# Altium PCB PCB_CL-SP-01.PcbDoc
Units mm, origin at the board's own origin, x right, y up, seen from the top; angles counter-clockwise.
Board outline 51.05 x 93.6 mm, 2 copper layers (Top Layer, Bottom Layer); 55 components, 21 nets, 131 pads, 96 vias.
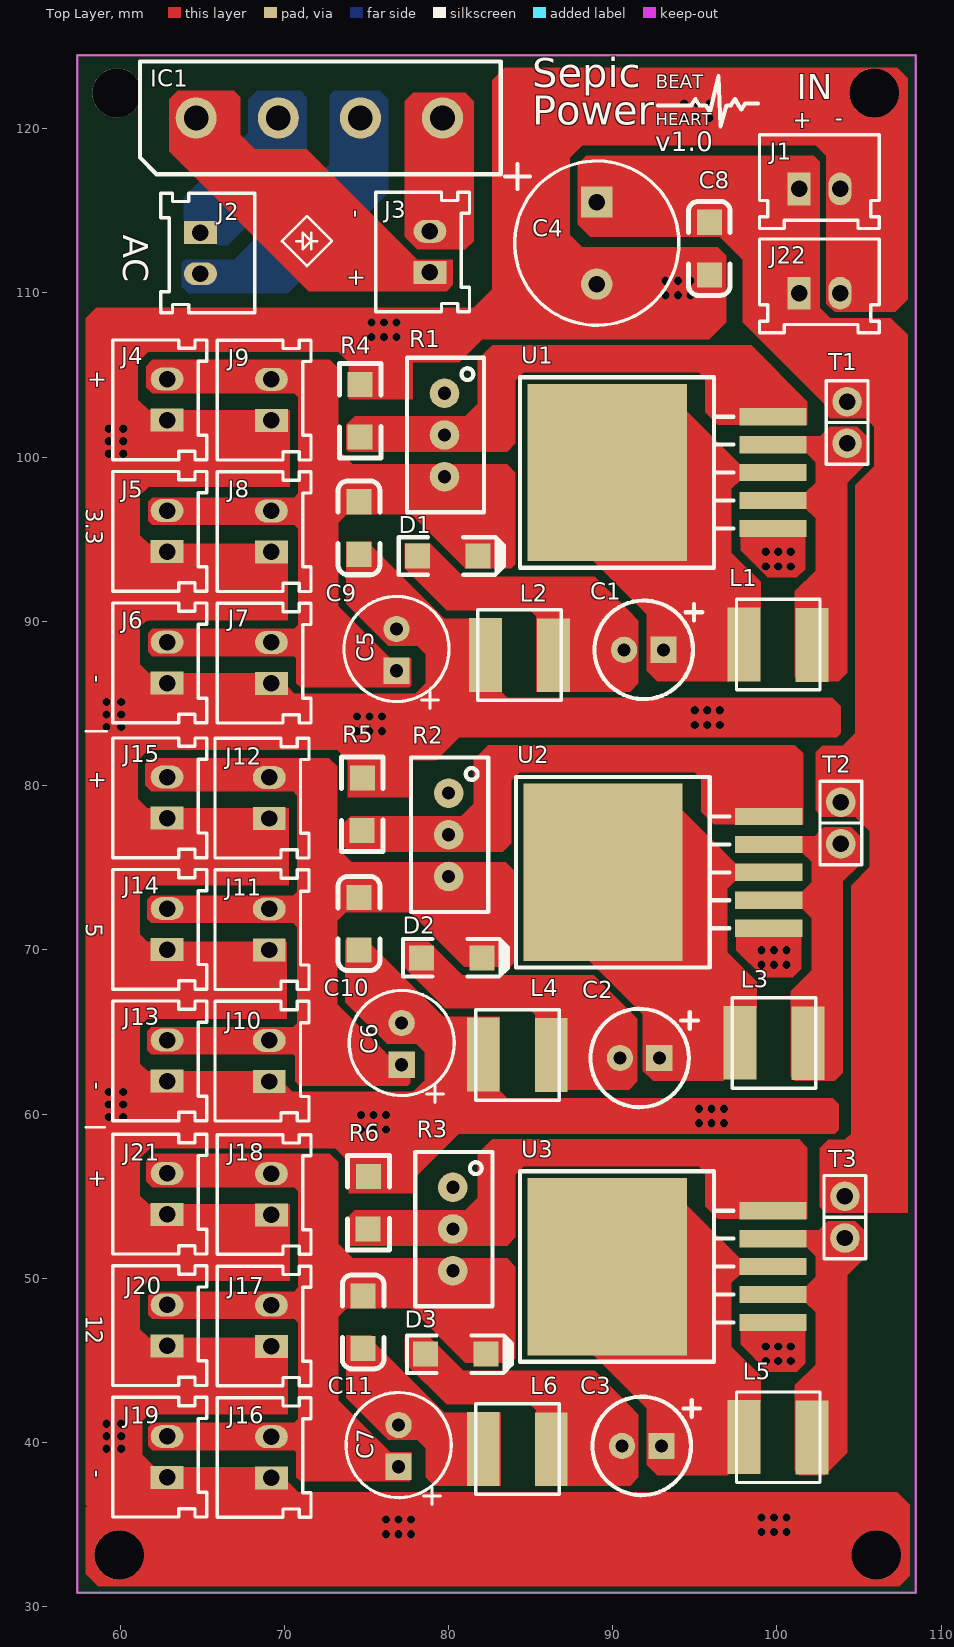
[diagram p0: Top Layer view]
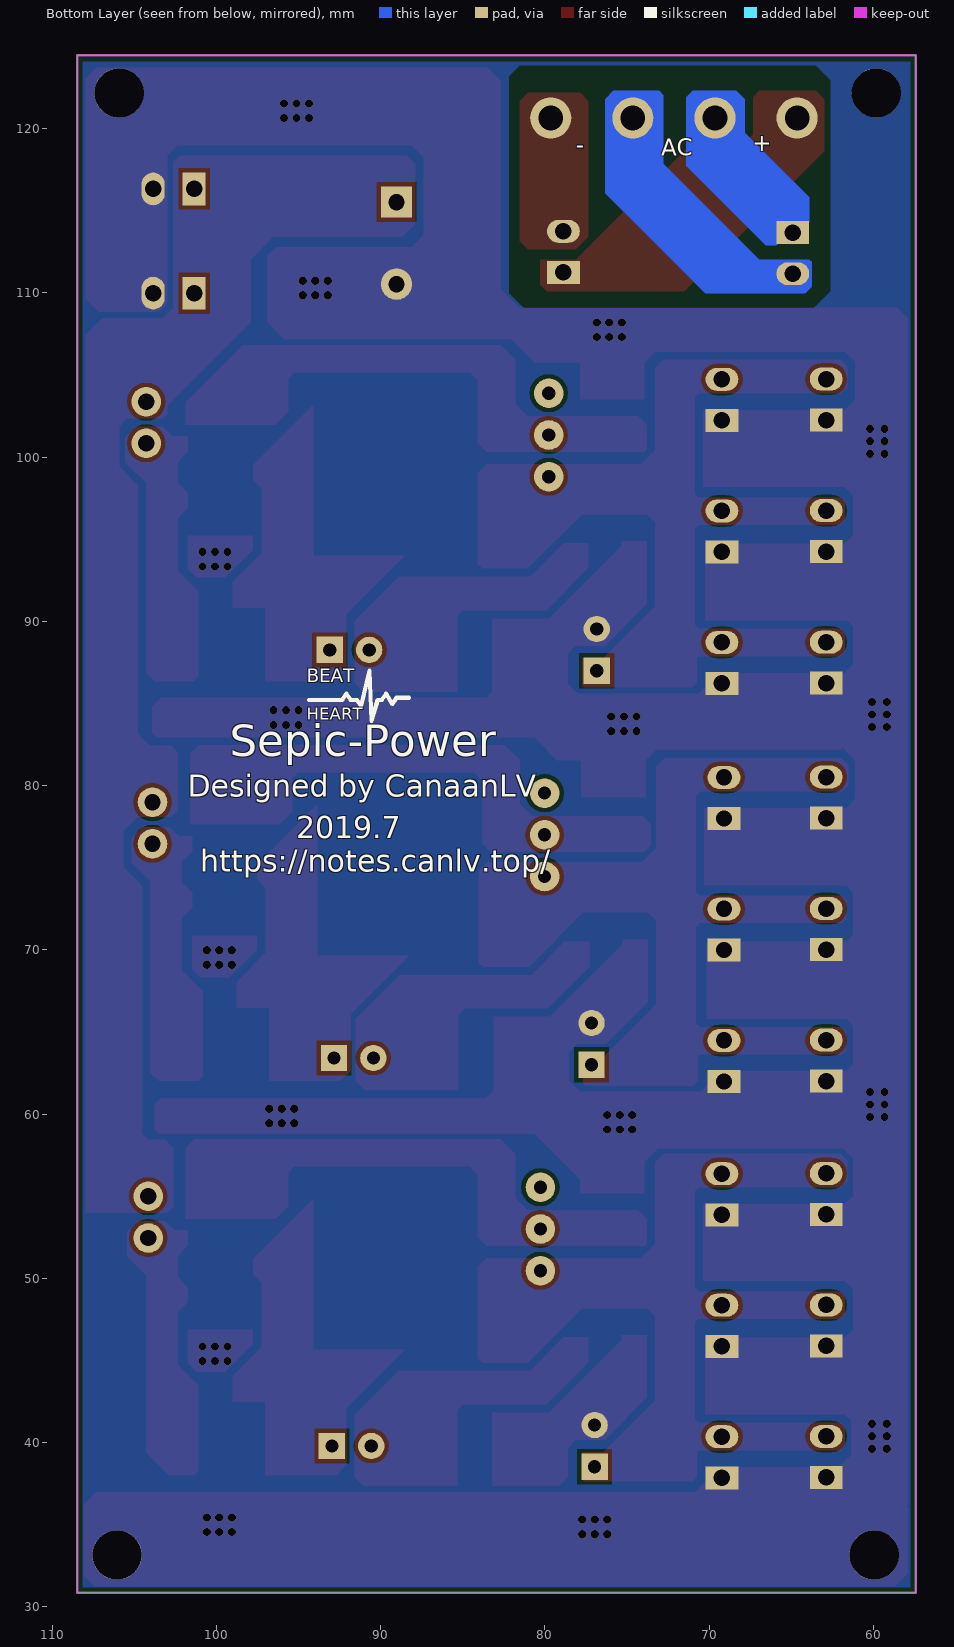
[diagram p1: Bottom Layer view, seen from below]

## Layer stack, top to bottom
Top Solder: solder mask 0.0102, Solder Resist, Dk 3.5
Top Layer: signal copper 0.0356
Dielectric 1: dielectric 0.32, FR-4, Dk 4.8
Bottom Layer: signal copper 0.0356
Bottom Solder: solder mask 0.0102, Solder Resist, Dk 3.5

## Board outline
57.404,30.861 108.458,30.861 108.458,124.46 57.404,124.46

## Design rules (kind name [scope] priority, off if disabled: settings)
Clearance [All] p1: gap=0.254
PolygonConnect [All] p1: connectstyle=Direct reliefconductorwidth=0.254 reliefentries=4 polygonreliefangle="90 Angle" airgapwidth=0.254
RoomDefinition Sheet_CL-SP-01 [InComponentClass('Sheet1')] p1: confinementstyle=ConfineIn formatcopy=TRUE lockcomponents=FALSE outline 57.404,30.861 108.458,30.861 108.458,124.714 57.404,124.714
RoutingVias [All] p1: holewidth=0.711 width=1.27 viastyle="Through Hole" minholewidth=0.711 minwidth=1.27 maxholewidth=0.711 maxwidth=1.27
SolderMaskExpansion [All] p1: expansion=0.102
Width [All] p1: maxlimit=0.254 minlimit=0.254 preferedwidth=0.254
30 further rules are at their usual default settings.

## Components (designator, comment, footprint, x,y, rotation, side; value= is the part's Value field where it differs from the comment)
C1 "uF" CZ0.60/50V47U 93.091,88.265 r0 top
C2 "uF" CZ0.60/50V47U 92.837,63.413 r0 top
C3 "uF" CZ0.60/50V47U 92.964,39.791 r0 top
C4 "470uF" CZ1.00/35V470uF 89.027,113.03 r180 top
C5 "uF" CZ0.65/25V100U 76.835,88.265 r90 top
C6 "uF" CZ0.65/25V100U 77.149,64.273 r90 top
C7 "uF" CZ0.65/25V100U 76.962,39.791 r90 top
C8 "uF" C1206 95.885,114.3 r270 top
C9 "uF" C1206 74.549,97.282 r270 top
C10 "uF" C1206 74.549,73.192 r270 top
C11 "uF" C1206 74.803,48.935 r270 top
D1 "0805D" 0805D 79.883,93.98 r0 top
D2 "0805D" 0805D 80.137,69.509 r0 top
D3 "0805D" 0805D 80.391,45.379 r0 top
IC1 "整流桥1" 整流桥3 72.136,120.65 r0 top
J1 "SIP-2" 2.54XH接插件2P 101.346,116.332 r0 top
J2 "SIP-2" 2.54XH接插件2P 64.897,113.665 r270 top
J3 "SIP-2" 2.54XH接插件2P 78.867,111.252 r90 top
J4 "SIP-2" 2.54XH接插件2P 62.865,102.249 r90 top
J5 "SIP-2" 2.54XH接插件2P 62.865,94.241 r90 top
J6 "SIP-2" 2.54XH接插件2P 62.865,86.233 r90 top
J7 "SIP-2" 2.54XH接插件2P 69.215,86.219 r90 top
J8 "SIP-2" 2.54XH接插件2P 69.215,94.227 r90 top
J9 "SIP-2" 2.54XH接插件2P 69.215,102.235 r90 top
J10 "SIP-2" 2.54XH接插件2P 69.088,61.981 r90 top
J11 "SIP-2" 2.54XH接插件2P 69.088,69.989 r90 top
J12 "SIP-2" 2.54XH接插件2P 69.088,77.997 r90 top
J13 "SIP-2" 2.54XH接插件2P 62.865,62.002 r90 top
J14 "SIP-2" 2.54XH接插件2P 62.865,70.01 r90 top
J15 "SIP-2" 2.54XH接插件2P 62.865,78.018 r90 top
J16 "SIP-2" 2.54XH接插件2P 69.215,37.851 r90 top
J17 "SIP-2" 2.54XH接插件2P 69.215,45.859 r90 top
J18 "SIP-2" 2.54XH接插件2P 69.215,53.867 r90 top
J19 "SIP-2" 2.54XH接插件2P 62.865,37.872 r90 top
J20 "SIP-2" 2.54XH接插件2P 62.865,45.88 r90 top
J21 "SIP-2" 2.54XH接插件2P 62.865,53.888 r90 top
J22 "SIP-2" 2.54XH接插件2P 101.346,109.982 r0 top
L1 "贴片电感" L5X5 102.616,86.106 r180 top
L2 "贴片电感" L5X5 86.868,85.471 r180 top
L3 "贴片电感" L5X5 102.362,61.849 r180 top
L4 "贴片电感" L5X5 86.741,61.127 r180 top
L5 "贴片电感" L5X5 102.616,37.846 r180 top
L6 "贴片电感" L5X5 86.741,37.124 r180 top
R1 "主控" ADJ-3296-1 79.756,101.346 r90 top
R2 "主控" ADJ-3296-1 80.01,77.002 r90 top
R3 "主控" ADJ-3296-1 80.264,52.999 r90 top
R4 "R贴片电阻" R1206 74.549,102.616 r270 top
R5 "R贴片电阻" R1206 74.676,78.653 r270 top
R6 "R贴片电阻" R1206 75.057,54.396 r270 top
T1 "SIP-2" 2.54排针1X2 104.267,103.378 r270 top
T2 "SIP-2" 2.54排针1X2 103.886,78.994 r270 top
T3 "SIP-2" 2.54排针1X2 104.14,54.991 r270 top
U1 "XL6009" TO-263-5 89.662,99.06 r90 top
U2 "XL6009" TO-263-5 89.408,74.716 r90 top
U3 "XL6009" TO-263-5 89.662,50.713 r90 top

## Footprints (in the part's own frame and the unit in brackets; to place one, negate y for a bottom-side part, rotate by r counter-clockwise, add the part's x,y. Pads: shape width x height; smd on the part's side, far side on the other; paste and mask are expansions set on the pad)
2.54XH接插件2P [mm]
  rect 1.4x2 hole 1: 1(0,0)
  oval 1.4x2 hole 1: 2(2.5,0)
  silkscreen extent -2.41,-2.41 4.88,3.3, body extent -2.51,-2.3 4.99,3.4, height 7
2.54排针1X2 [mm]
  round 1.8 hole 1: 1(0,0) 2(2.54,0)
  silkscreen extent -1.27,-1.27 3.81,1.27, body extent -1.27,-1.27 3.81,1.27, height 8.54
0805D [mil]
  rect 60x60 smd: A(-70,0) K(75,0)
  silkscreen extent -114,-45 137,45, body extent -60,-29 70,30, height 39
ADJ-3296-1 [mm]
  round 1.8 hole 0.8: 1(-2.54,0) 2(0,0) 3(2.54,0)
  silkscreen extent -4.7,-2.41 4.7,2.29, body extent -4.76,-2.42 4.76,2.41, height 11.55
C1206 [mil] "3216/A型"
  rect 60x60 smd: 1(0,0) 2(126,0)
  silkscreen extent -50,-50 175,50, body extent 0,-31 126,32, height 39
CZ0.60/50V47U [mm]
  rect 1.6x1.6 hole 0.8: 1(0,0)
  round 1.6 hole 0.8: 2(-2.4,0)
  silkscreen extent -4.2,-3 2.36,3, body extent -4.45,-3.17 1.91,3.18, height 13.03
CZ0.65/25V100U [mm]
  rect 1.6x1.6 hole 0.8: 1(-1.27,0)
  round 1.6 hole 0.8: 2(1.27,0)
  silkscreen extent -3.56,-3.2 3.25,3.2, body extent -3.3,-3.05 3.05,3.3, height 13.03
CZ1.00/35V470uF [mm]
  rect 1.905x1.905 hole 1: 1(0,-2.5)
  round 1.905 hole 1: 2(0,2.5)
  silkscreen extent -5,-5 5.59,5, body extent -4.95,-5 5.03,5, height 16.8
L5X5 [mm]
  rect 2x4.5 smd: 1(0.483,-2.464) 2(4.623,-2.489)
  silkscreen extent 0,-5.23 5.08,0.28, body extent 0.06,-4.91 4.96,-0.01, height 2.91
R1206 [mil] "1/4W"
  rect 60x60 smd: 1(-71,3) 2(55,2)
  silkscreen extent -121,-47 105,53, body extent -71,-29 55,33, height 24
TO-263-5 [mm] "TO-263, 5PIN"
  rect 1.05x4.1 smd: 1(-3.4,-10.1) 2(-1.7,-10.1) 3(0,-10.1) 4(1.7,-10.1) 5(3.4,-10.1)
  rect 10.8x9.7 smd: 6(0,0)
  silkscreen extent -5.8,-7.7 5.8,5.3, body extent -5.1,-10.1 5.06,3.91, height 4.56
整流桥3 [mm]
  round 2.5 hole 1.5: 1(-7.5,0) 2(-2.5,0) 3(2.5,0) 4(7.5,0)
  silkscreen extent -10.92,-3.43 11.05,3.43

## Part data
C1 C2 C3 C4 C5 C6 C7: library part C直插电容
C8 C9 C10 C11: library part C贴片电容
R1 R2 R3: library part R电位器
U1 U2 U3: "Switching Power"

## Free pads (board coordinates)
  round 3 hole 3: 0(59.817,122.174) 1(105.918,122.174) 2(106.045,33.147) 3(59.944,33.147)

## Via types
v1: diameter 0.5, hole 0.5, Top Layer to Bottom Layer, tented both sides, 96 vias

## Nets (pads, with @x,y where several pads share a name; then routed paths per layer and width w, separated by ;. In a path a pad name is that pad's centre, name@x,y a point inside that pad or via, vN(x,y) a via of type N, cw(c..) or ccw(c..) an arc to the next point about the centre after c; other vN are vias at no path point)
3.3V: C5.1 C9.1 D1.K J4.2 J5.2 J6.2 J7.2 J8.2 J9.2 R1.1
5V: C6.1 C10.1 D2.K J10.2 J11.2 J12.2 J13.2 J14.2 J15.2 R2.1
12V: C7.1 C11.1 D3.K J16.2 J17.2 J18.2 J19.2 J20.2 J21.2 R3.1
GND: C4.2 C5.2 C6.2 C7.2 C8.2 C9.2 C10.2 C11.2 J1.2 J4.1 J5.1 J6.1 J7.1 J8.1 J9.1 J10.1 J11.1 J12.1 J13.1 J14.1 J15.1 J16.1 J17.1 J18.1 J19.1 J20.1 J21.1 J22.2 L2.2 L4.2 L6.2 pad.0 pad.1 pad.2 pad.3 R4.1 R5.1 R6.1 U1.1 U2.1 U3.1
  other v1: 76.2,34.417 76.962,34.417 77.724,34.417 99.06,34.544 99.822,34.544 100.584,34.544 76.2,35.306 76.962,35.306 77.724,35.306 99.06,35.433 99.822,35.433 100.584,35.433 59.182,39.624 60.071,39.624 59.182,40.386 60.071,40.386 59.182,41.148 60.071,41.148 99.314,44.958 100.076,44.958 100.838,44.958 99.314,45.847 100.076,45.847 100.838,45.847 74.676,59.055 75.438,59.055 76.2,59.055 95.25,59.436 96.012,59.436 96.774,59.436 59.309,59.817 60.198,59.817 74.676,59.944 75.438,59.944 76.2,59.944 95.25,60.325 96.012,60.325 96.774,60.325 59.309,60.579 60.198,60.579 59.309,61.341 60.198,61.341 99.06,69.088 99.822,69.088 100.584,69.088 99.06,69.977 99.822,69.977 100.584,69.977 74.422,83.312 75.184,83.312 75.946,83.312 59.182,83.566 60.071,83.566 94.996,83.693 95.758,83.693 96.52,83.693 74.422,84.201 75.184,84.201 75.946,84.201 59.182,84.328 60.071,84.328 94.996,84.582 95.758,84.582 96.52,84.582 59.182,85.09 60.071,85.09 99.314,93.345 100.076,93.345 100.838,93.345 99.314,94.234 100.076,94.234 100.838,94.234 59.309,100.203 60.198,100.203 59.309,100.965 60.198,100.965 59.309,101.727 60.198,101.727 75.311,107.315 76.073,107.315 76.835,107.315 75.311,108.204 76.073,108.204 76.835,108.204 93.218,109.855 93.98,109.855 94.742,109.855 93.218,110.744 93.98,110.744 94.742,110.744 94.361,120.65 95.123,120.65 95.885,120.65 94.361,121.539 95.123,121.539 95.885,121.539
NetC1_1: C1.1 L1.2 U1.3 U1.6
NetC1_2: C1.2 D1.A L2.1
NetC2_1: C2.1 L3.2 U2.3 U2.6
NetC2_2: C2.2 D2.A L4.1
NetC3_1: C3.1 L5.2 U3.3 U3.6
NetC3_2: C3.2 D3.A L6.1
NetIC1_1: IC1.1 J3.1
NetIC1_2: IC1.2 J2.1
NetIC1_3: IC1.3 J2.2
NetIC1_4: IC1.4 J3.2
NetL1_1: L1.1 T1.2 U1.2 U1.4
NetL3_1: L3.1 T2.2 U2.2 U2.4
NetL5_1: L5.1 T3.2 U3.2 U3.4
NetR1_2: R1.2 R4.2 U1.5
NetR2_2: R2.2 R5.2 U2.5
NetR3_2: R3.2 R6.2 U3.5
VCC: C4.1 C8.1 J1.1 J22.1 T1.1 T2.1 T3.1
pads on no net: R1.3 R2.3 R3.3

## Polygon pours and split planes (outlines as drawn)
GND on Bottom Layer "GND_L02_P000" (solid, remove dead copper, pour order 0): 57.531,124.079 57.404,123.952 57.404,30.861 108.331,30.861 108.331,124.079

## Keep-outs
Keep-Out Layer:
  the board outline again, w0.152

## Other copper
Top Layer:
  rectangle net GND: 61.722,49.824 70.358,54.523
  rectangle net GND: 61.722,41.696 70.231,46.395
  rectangle net GND: 61.722,35.981 70.104,38.521
  rectangle net GND: 73.914,55.158 77.851,57.444
  rectangle net GND: 61.655,73.925 70.291,78.624
  rectangle net GND: 61.655,65.797 70.164,70.496
  rectangle net GND: 61.655,60.082 70.037,62.622
  rectangle net GND: 73.847,79.259 77.784,81.545
  rectangle net GND: 73.914,103.505 77.851,105.791
  rectangle net GND: 61.722,84.328 70.104,86.868
  rectangle net GND: 61.722,90.043 70.231,94.742
  rectangle net GND: 61.722,98.171 70.358,102.87
  region net GND: 57.912,36.068 57.912,32.004 58.674,31.242 107.442,31.242 108.077,31.877 108.077,36.195 107.315,36.957 70.866,36.957 69.977,37.846
  region net GND: 97.79,95.21 97.79,94.321 99.441,92.67 101.219,92.67 101.727,93.178 101.727,95.21
  region net GND: 97.536,70.866 97.536,69.977 99.187,68.326 100.965,68.326 101.473,68.834 101.473,70.866
  region net GND: 97.79,46.863 97.79,45.974 99.441,44.323 101.219,44.323 101.727,44.831 101.727,46.863
  region net GND: 102.997,109.347 103.505,108.839 107.188,108.839 107.95,109.601 107.95,123.063 107.315,123.698 83.439,123.698 82.677,122.936 82.677,110.236 81.534,109.093 58.547,109.093 57.912,108.458 57.912,36.195 58.674,35.433 69.556,35.433 70.104,35.981 67.604,38.481 62.103,38.481 61.341,39.243 61.341,41.315 61.722,41.696 61.722,46.395 61.214,46.903 61.214,49.316 61.722,49.824 61.722,54.523 61.214,55.031 61.214,57.296 61.849,57.931 61.655,58.125 61.655,62.622 61.214,63.063 61.214,65.356 61.655,65.797 61.655,70.496 61.214,70.937 61.214,73.484 61.655,73.925 61.655,78.624 61.087,79.192 61.087,81.534 61.849,82.296 61.722,82.423 61.722,86.868 61.214,87.376 61.214,89.662 61.595,90.043 61.722,90.043 61.722,94.742 61.214,95.25 61.214,97.663 61.722,98.171 61.722,102.87 61.087,103.505 61.087,105.791 61.722,106.426 73.279,106.426 73.914,105.791 80.645,105.791 82.042,107.188 88.138,107.188 88.138,112.776 87.376,113.538 87.376,118.237 88.138,118.999 102.362,118.999 102.997,118.364
  region net GND: 96.393,112.776 96.901,112.268 96.901,108.204 95.885,107.188 87.63,107.188 87.63,112.268 88.138,112.776
  region net VCC: 87.884,114.173 88.646,113.411 96.52,113.411 97.917,112.014 97.917,111.125 97.917,108.204 103.048,103.073 106.333,104.047 107.95,105.664 107.95,107.442 106.934,108.458 103.251,108.458 102.616,109.093 102.616,117.983 102.235,118.364 88.392,118.364 87.884,117.856
  region net NetIC1_4: 81.026,112.649 81.534,113.157 81.534,121.666 81.026,122.174 77.851,122.174 77.343,121.666 77.343,113.411 78.105,112.649
  region net NetIC1_1: 63.5,122.301 62.992,121.793 62.992,118.618 71.501,110.109 79.883,110.109 80.264,110.49 80.264,112.014 78.105,112.014 71.374,118.745 68.199,118.745 67.31,119.634 67.31,121.92 66.929,122.301
  region net VCC: 103.378,105.664 102.997,105.283 102.997,102.616 103.251,102.362 105.41,102.362 105.918,101.854 105.918,99.441 104.775,98.298 104.775,83.185 104.013,82.423 102.743,82.423 102.362,82.042 102.362,78.486 102.743,78.105 104.775,78.105 105.664,77.216 105.664,75.057 104.521,73.914 104.521,58.801 104.14,58.42 103.124,58.42 102.616,57.912 102.616,54.356 102.997,53.975 107.95,53.975 107.95,105.664
  region net NetL5_1: 102.514,52.883 103.099,53.467 104.775,53.467 105.41,52.832 105.41,51.308 104.14,50.038 104.013,50.038
  region net NetL3_1: 102.26,76.886 102.845,77.47 104.521,77.47 105.156,76.835 105.156,75.311 103.886,74.041 103.759,74.041
  region net NetL1_1: 102.641,101.27 103.226,101.854 104.902,101.854 105.537,101.219 105.537,99.695 104.267,98.425 104.14,98.425
  region net GND: 61.595,60.09 61.595,58.185 61.849,57.931 73.096,57.931 75.147,55.88 77.705,55.88 80.626,58.801 103.505,58.801 103.759,59.055 103.759,60.598 103.397,60.96 83.585,60.96 82.55,61.995 78.486,61.995 77.851,61.36 70.485,61.36 70.104,61.741
  region net GND: 61.722,84.328 61.722,82.423 61.976,82.169 73.223,82.169 73.847,81.545 79.259,81.545 80.645,82.931 103.632,82.931 103.886,83.185 103.886,84.836 103.378,85.344 83.566,85.344 82.677,86.233 78.613,86.233 77.978,85.598 70.612,85.598 70.231,85.979
  region net NetC3_2: 91.059,37.378 91.567,37.886 91.567,41.696 90.932,42.331 85.725,42.331 85.344,41.95 85.344,37.378
  region net NetC3_2: 78.867,46.395 80.899,44.363 88.9,44.363 90.932,42.331 90.551,41.95 85.344,41.95 84.963,42.331 79.883,42.331 77.343,44.871 77.343,46.395
  region net 12V: 73.787,50.713 74.295,51.221 83.566,51.221 84.074,50.713 84.074,45.125 83.82,44.871 81.026,44.871 77.724,48.173 73.787,48.173
  region net GND: 75.311,46.522 75.311,46.268 79.756,41.823 83.185,41.823 83.185,37.378 79.121,37.378 78.613,37.886 78.613,39.664 78.105,40.172 76.327,40.172 73.787,42.712 73.787,46.522
  region net 12V: 77.724,39.41 76.454,39.41 73.279,42.585 73.279,47.665 74.295,48.681 74.295,51.221 74.168,51.221 73.279,52.11 73.279,57.063 72.771,57.571 61.976,57.571 61.595,57.19 61.595,55.92 61.976,55.539 70.612,55.539 70.866,55.285 70.866,49.443 70.612,49.189 61.976,49.189 61.722,48.935 61.722,47.792 61.976,47.538 70.612,47.538 70.866,47.284 70.866,41.442 70.612,41.188 61.976,41.188 61.722,40.934 61.722,39.791 61.976,39.537 70.612,39.537 70.739,39.41 70.739,37.886 70.993,37.632 77.597,37.632 77.724,37.759
  region net NetC2_2: 90.992,61.479 91.5,61.987 91.5,65.797 90.865,66.432 85.658,66.432 85.277,66.051 85.277,61.479
  region net NetC2_2: 78.8,70.496 80.832,68.464 88.833,68.464 90.865,66.432 90.484,66.051 85.277,66.051 84.896,66.432 79.816,66.432 77.276,68.972 77.276,70.496
  region net 5V: 73.72,74.814 74.228,75.322 83.499,75.322 84.007,74.814 84.007,69.226 83.753,68.972 80.959,68.972 77.657,72.274 73.72,72.274
  region net GND: 75.244,70.623 75.244,70.369 79.689,65.924 83.118,65.924 83.118,61.479 79.054,61.479 78.546,61.987 78.546,63.765 78.038,64.273 76.26,64.273 73.72,66.813 73.72,70.623
  region net 5V: 77.657,63.511 76.387,63.511 73.212,66.686 73.212,71.766 74.228,72.782 74.228,75.322 74.101,75.322 73.212,76.211 73.212,81.164 72.704,81.672 61.909,81.672 61.528,81.291 61.528,80.021 61.909,79.64 70.545,79.64 70.799,79.386 70.799,73.544 70.545,73.29 61.909,73.29 61.655,73.036 61.655,71.893 61.909,71.639 70.545,71.639 70.799,71.385 70.799,65.543 70.545,65.289 61.909,65.289 61.655,65.035 61.655,63.892 61.909,63.638 70.545,63.638 70.672,63.511 70.672,61.987 70.926,61.733 77.53,61.733 77.657,61.86
  region net NetC3_1: 97.028,38.013 92.71,38.013 92.075,38.648 92.075,42.077 88.519,45.633 94.615,45.633 97.028,43.22
  region net NetC2_1: 96.774,62.016 92.456,62.016 91.821,62.651 91.821,66.08 88.265,69.636 94.361,69.636 96.774,67.223
  region net NetR3_2: 101.854,57.952 101.346,58.46 82.677,58.46 81.788,57.571 81.788,54.904 81.026,54.142 74.295,54.142 73.787,53.634 73.787,52.11 73.914,51.983 83.566,51.983 84.074,52.491 84.074,56.301 84.582,56.809 95.25,56.809 95.631,56.428 95.631,54.396 96.393,53.634 101.854,53.634
  region net NetR2_2: 101.6,81.955 101.092,82.463 82.423,82.463 81.534,81.574 81.534,78.907 80.772,78.145 74.041,78.145 73.533,77.637 73.533,76.367 73.914,75.986 83.312,75.986 83.82,76.494 83.82,80.304 84.328,80.812 94.996,80.812 95.377,80.431 95.377,78.399 96.139,77.637 101.6,77.637
  region net NetC3_1: 99.009,42.458 99.009,44.058 97.231,45.836 97.231,49.722 97.765,50.256 97.765,51.196 94.107,54.853 94.107,45.354 96.977,42.483
  region net NetC2_1: 98.755,66.461 98.755,68.061 96.977,69.839 96.977,73.725 97.511,74.259 97.511,75.199 93.853,78.856 93.853,69.357 96.723,66.486
  region net NetL5_1: 101.727,52.923 103.556,52.923 104.267,52.212 104.267,39.37 102.91,38.013 101.346,38.013 101.092,38.267 101.092,43.474 102.362,44.744 102.362,47.919 101.727,48.554 101.727,49.468 102.362,50.103 102.362,51.348 101.727,51.983
  region net NetL3_1: 101.473,76.926 103.302,76.926 104.013,76.215 104.013,62.524 103.505,62.016 101.092,62.016 100.838,62.27 100.838,67.477 102.108,68.747 102.108,71.922 101.473,72.557 101.473,73.471 102.108,74.106 102.108,75.351 101.473,75.986
  region net 3.3V: 77.724,87.757 76.454,87.757 73.279,90.932 73.279,96.012 74.295,97.028 74.295,99.568 74.168,99.568 73.279,100.457 73.279,105.41 72.771,105.918 61.976,105.918 61.595,105.537 61.595,104.267 61.976,103.886 70.612,103.886 70.866,103.632 70.866,97.79 70.612,97.536 61.976,97.536 61.722,97.282 61.722,96.139 61.976,95.885 70.612,95.885 70.866,95.631 70.866,89.789 70.612,89.535 61.976,89.535 61.722,89.281 61.722,88.138 61.976,87.884 70.612,87.884 70.739,87.757 70.739,86.233 70.993,85.979 77.597,85.979 77.724,86.106
  region net GND: 75.311,94.869 75.311,94.615 79.756,90.17 83.185,90.17 83.185,85.725 79.121,85.725 78.613,86.233 78.613,88.011 78.105,88.519 76.327,88.519 73.787,91.059 73.787,94.869
  region net 3.3V: 73.787,99.06 74.295,99.568 83.566,99.568 84.074,99.06 84.074,93.472 83.82,93.218 81.026,93.218 77.724,96.52 73.787,96.52
  region net NetR1_2: 101.854,103.378 98.425,106.807 82.677,106.807 81.788,105.918 81.788,103.251 81.026,102.489 74.295,102.489 73.787,101.981 73.787,100.457 73.914,100.33 83.566,100.33 84.074,100.838 84.074,104.648 84.582,105.156 95.25,105.156 95.631,104.775 95.631,102.743 96.393,101.981 101.854,101.981
  region net NetC1_2: 78.867,94.742 80.899,92.71 88.9,92.71 90.932,90.678 90.551,90.297 85.344,90.297 84.963,90.678 79.883,90.678 77.343,93.218 77.343,94.742
  region net NetC1_2: 91.059,85.725 91.567,86.233 91.567,90.043 90.932,90.678 85.725,90.678 85.344,90.297 85.344,85.725
  region net NetC1_1: 97.028,86.36 92.71,86.36 92.075,86.995 92.075,90.424 88.519,93.98 94.615,93.98 97.028,91.567
  region net NetC1_1: 99.009,90.805 99.009,92.405 97.231,94.183 97.231,98.069 97.765,98.603 97.765,99.543 94.107,103.2 94.107,93.701 96.977,90.83
  region net NetL1_1: 101.727,101.27 103.556,101.27 104.267,100.559 104.267,86.868 103.759,86.36 101.346,86.36 101.092,86.614 101.092,91.821 102.362,93.091 102.362,96.266 101.727,96.901 101.727,97.815 102.362,98.45 102.362,99.695 101.727,100.33
Bottom Layer:
  pour cut-out: 63.5,123.825 62.611,122.936 62.611,110.109 63.627,109.093 81.28,109.093 82.169,109.982 82.169,123.19 81.534,123.825
  region net NetIC1_3: 63.881,112.014 66.929,112.014 72.771,117.856 72.771,122.047 73.025,122.301 75.819,122.301 76.327,121.793 76.327,116.078 70.231,109.982 64.135,109.982 63.754,110.363 63.754,111.887
  region net NetIC1_2: 63.881,114.3 63.881,115.824 67.818,119.761 67.818,121.793 68.326,122.301 70.993,122.301 71.374,121.92 71.374,117.729 66.548,112.903 65.913,112.903

## Silkscreen, mask and mechanical layers (free items; w line width, h text height)
Top Overlay:
  lines w0.152: 57.912,59.182 59.055,59.182 ; 57.912,83.312 59.182,83.312 ; 70.739,113.157 71.12,113.157 ; 71.628,112.649 71.628,113.665 ; 72.009,113.157 71.628,113.157 ; 71.628,113.157 71.12,113.665 71.12,112.649 71.628,113.157 ; 69.85,113.157 71.374,111.633 72.898,113.157 71.374,114.681 69.85,113.157
  lines w0.254: 92.747,121.412 94.779,121.412 95.033,121.793 95.287,121.412 95.668,121.412 95.922,121.031 96.43,123.19 96.557,120.142 96.938,121.412 97.192,121.412 97.446,121.793 97.827,121.158 98.081,121.539 98.843,121.539
  text "BEAT" at 92.62,122.199 h1.4
  text "Sepic" at 85.09,121.92 h3.05
  text "IN" at 101.219,121.793 h1.52
  text "-" at 103.505,120.142 h1.02
  text "+" at 100.965,120.015 h1.02
  text "HEART" at 92.62,119.964 h1.27
  text "Power" at 85.09,119.634 h3.05
  text "v1.0" at 92.583,118.237 h2.03
  text "-" at 73.914,115.062 h1.02 r270
  text "AC" at 60.198,113.538 h1.52 r270
  text "+" at 73.914,111.506 h1.02 r270
  text "+" at 58.166,105.283 h1.02 r270
  text "3.3" at 57.912,96.901 h1.02 r270
  text "-" at 58.166,86.741 h1.02 r270
  text "+" at 58.166,80.899 h1.02 r270
  text "5" at 57.912,71.628 h1.02 r270
  text "-" at 58.166,61.976 h1.02 r270
  text "+" at 58.166,56.642 h1.02 r270
  text "12" at 57.912,47.752 h1.02 r270
  text "-" at 58.166,38.354 h1.02 r270
Bottom Overlay:
  lines w0.254: 88.265,85.344 89.027,85.344 89.281,84.963 89.662,85.598 89.916,85.217 90.17,85.217 90.551,83.947 90.678,86.995 91.186,84.836 91.44,85.217 91.821,85.217 92.075,85.598 92.329,85.217 94.361,85.217
  text "+" at 66.167,118.618 h1.02
  text "-" at 77.597,118.491 h1.02
  text "AC" at 72.898,118.364 h1.02
  text "BEAT" at 94.488,86.004 h1.4
  text "HEART" at 94.488,83.769 h1.27
  text "Sepic-Power" at 99.187,81.153 h3.3
  text "Designed by CanaanLV" at 101.727,78.867 h2.29
  text "2019.7" at 95.123,76.327 h2.29
  text "https://notes.canlv.top/" at 100.965,74.295 h2.29